# Altium PCB lab1_larionov_usb_rs232.PcbDoc
Units mm, origin at the board's own origin, x right, y up, seen from the top; angles counter-clockwise.
Board outline 53 x 36.1 mm, 4 copper layers (Top Layer, Signal Layer 1, Signal Layer 2, Bottom Layer), stack 1.522 mm thick; 33 components, 35 nets, 131 pads, 239 vias.
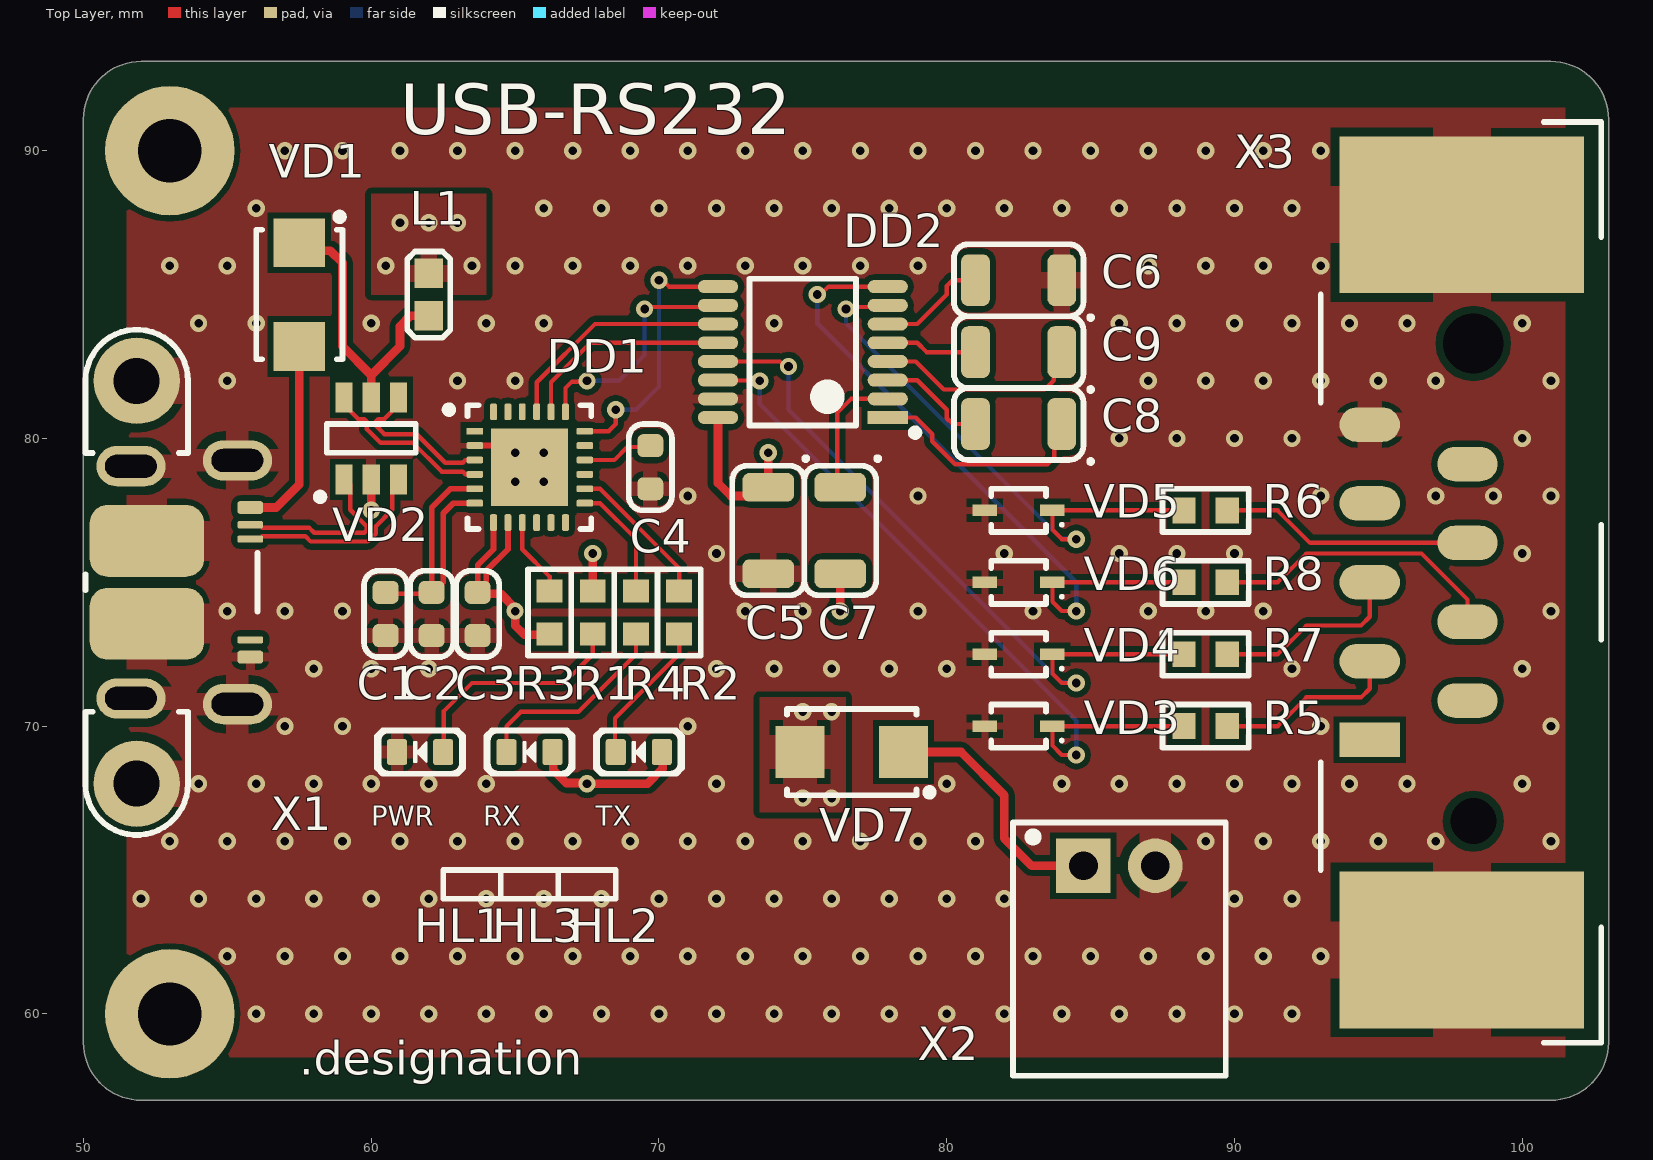
[diagram p0: Top Layer view]
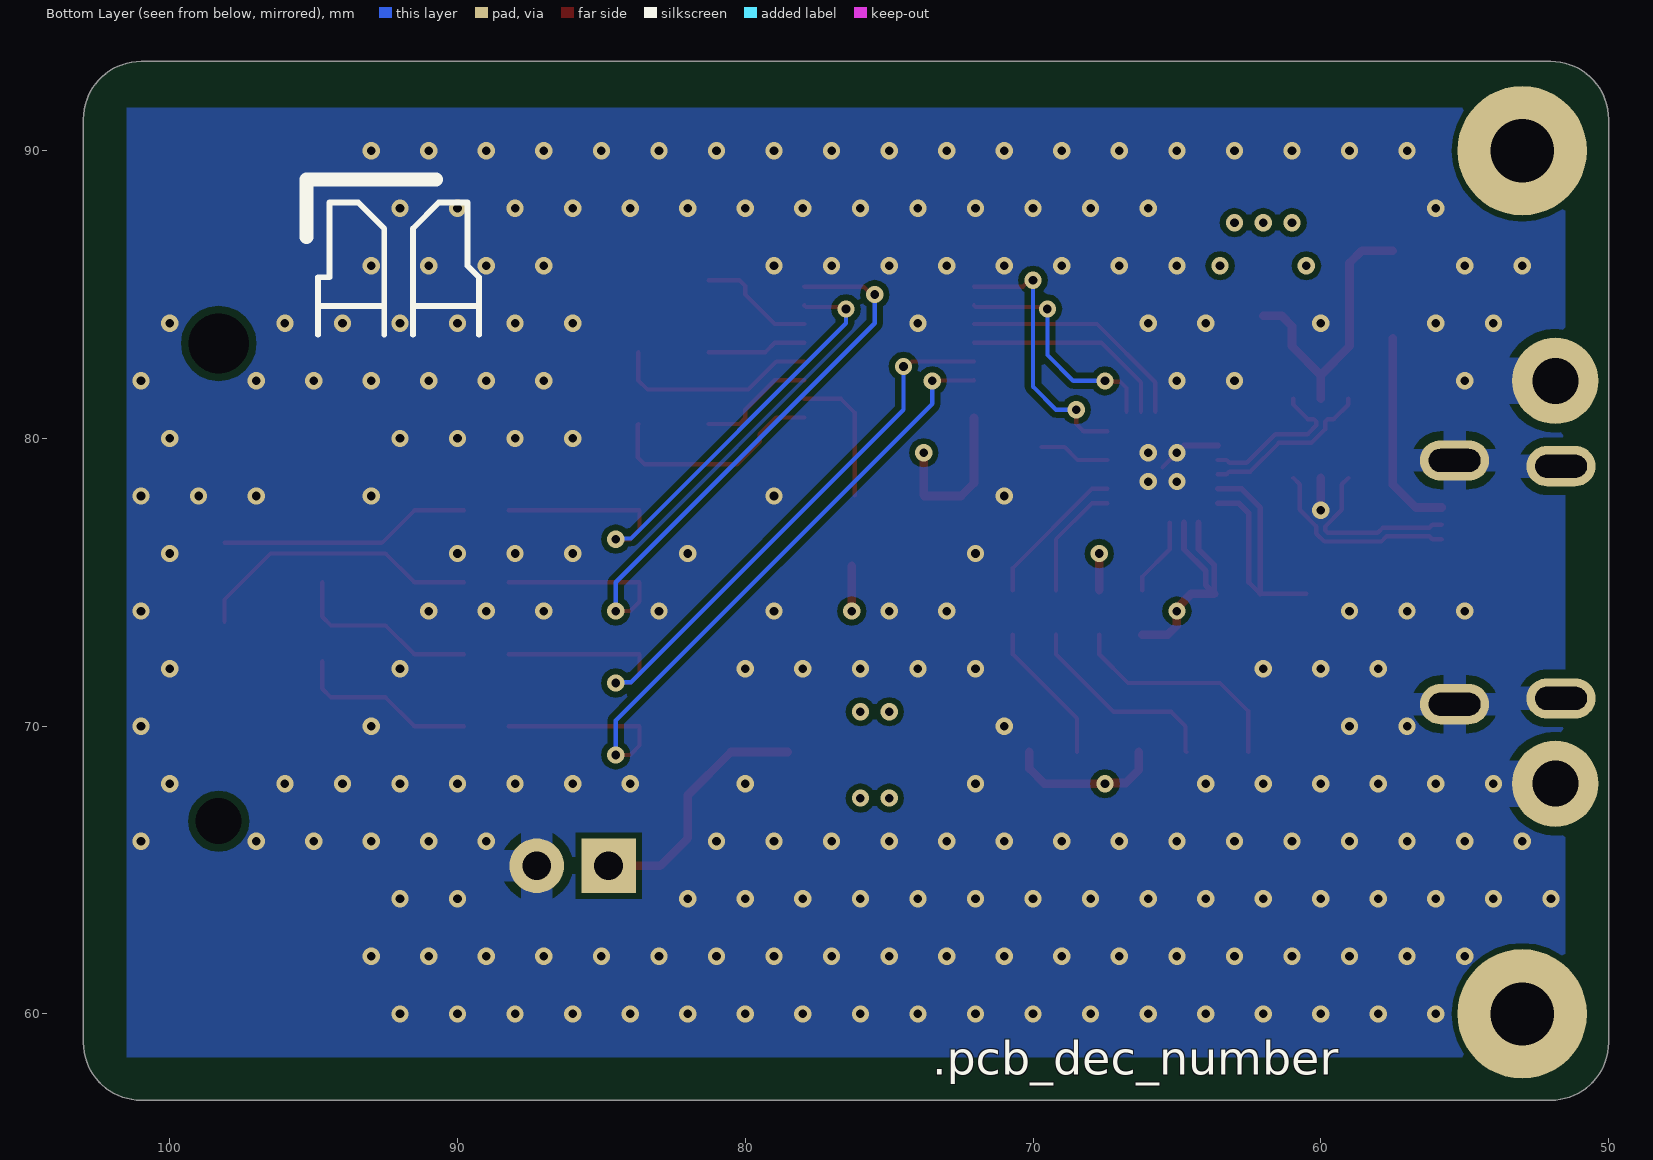
[diagram p1: Bottom Layer view, seen from below]
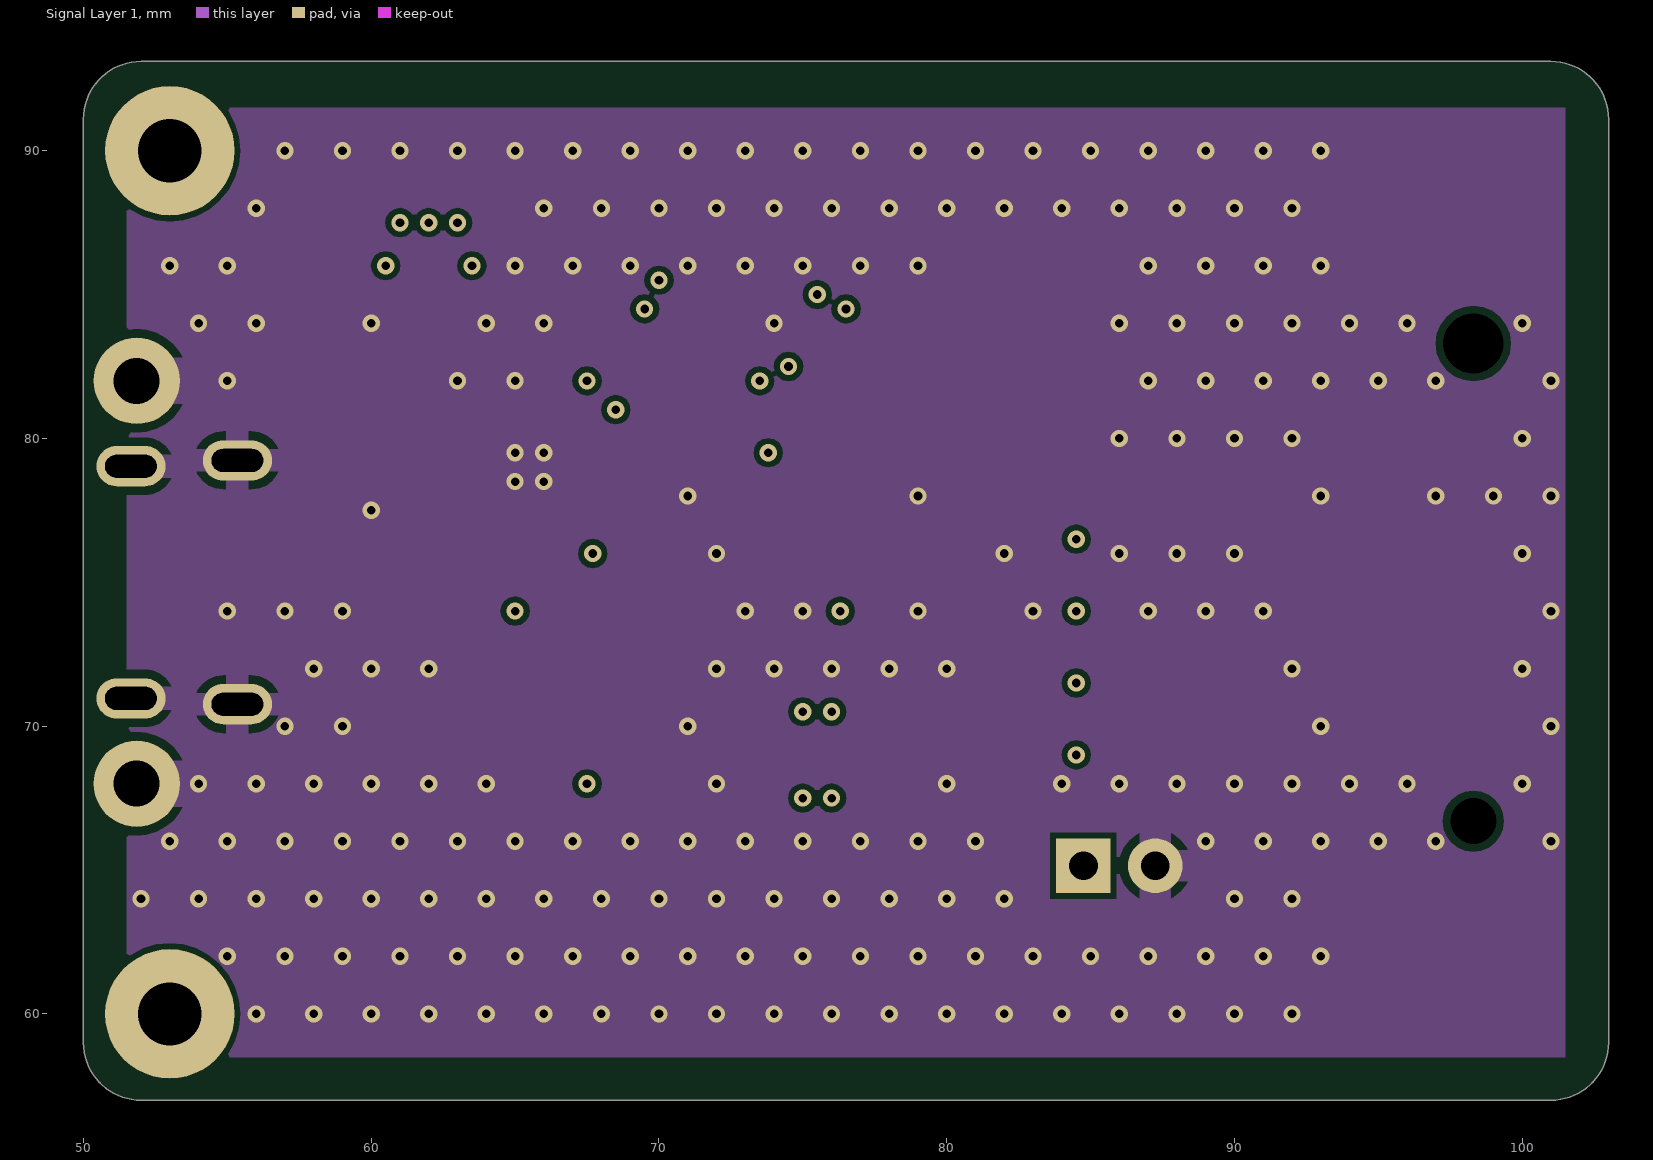
[diagram p2: Signal Layer 1]
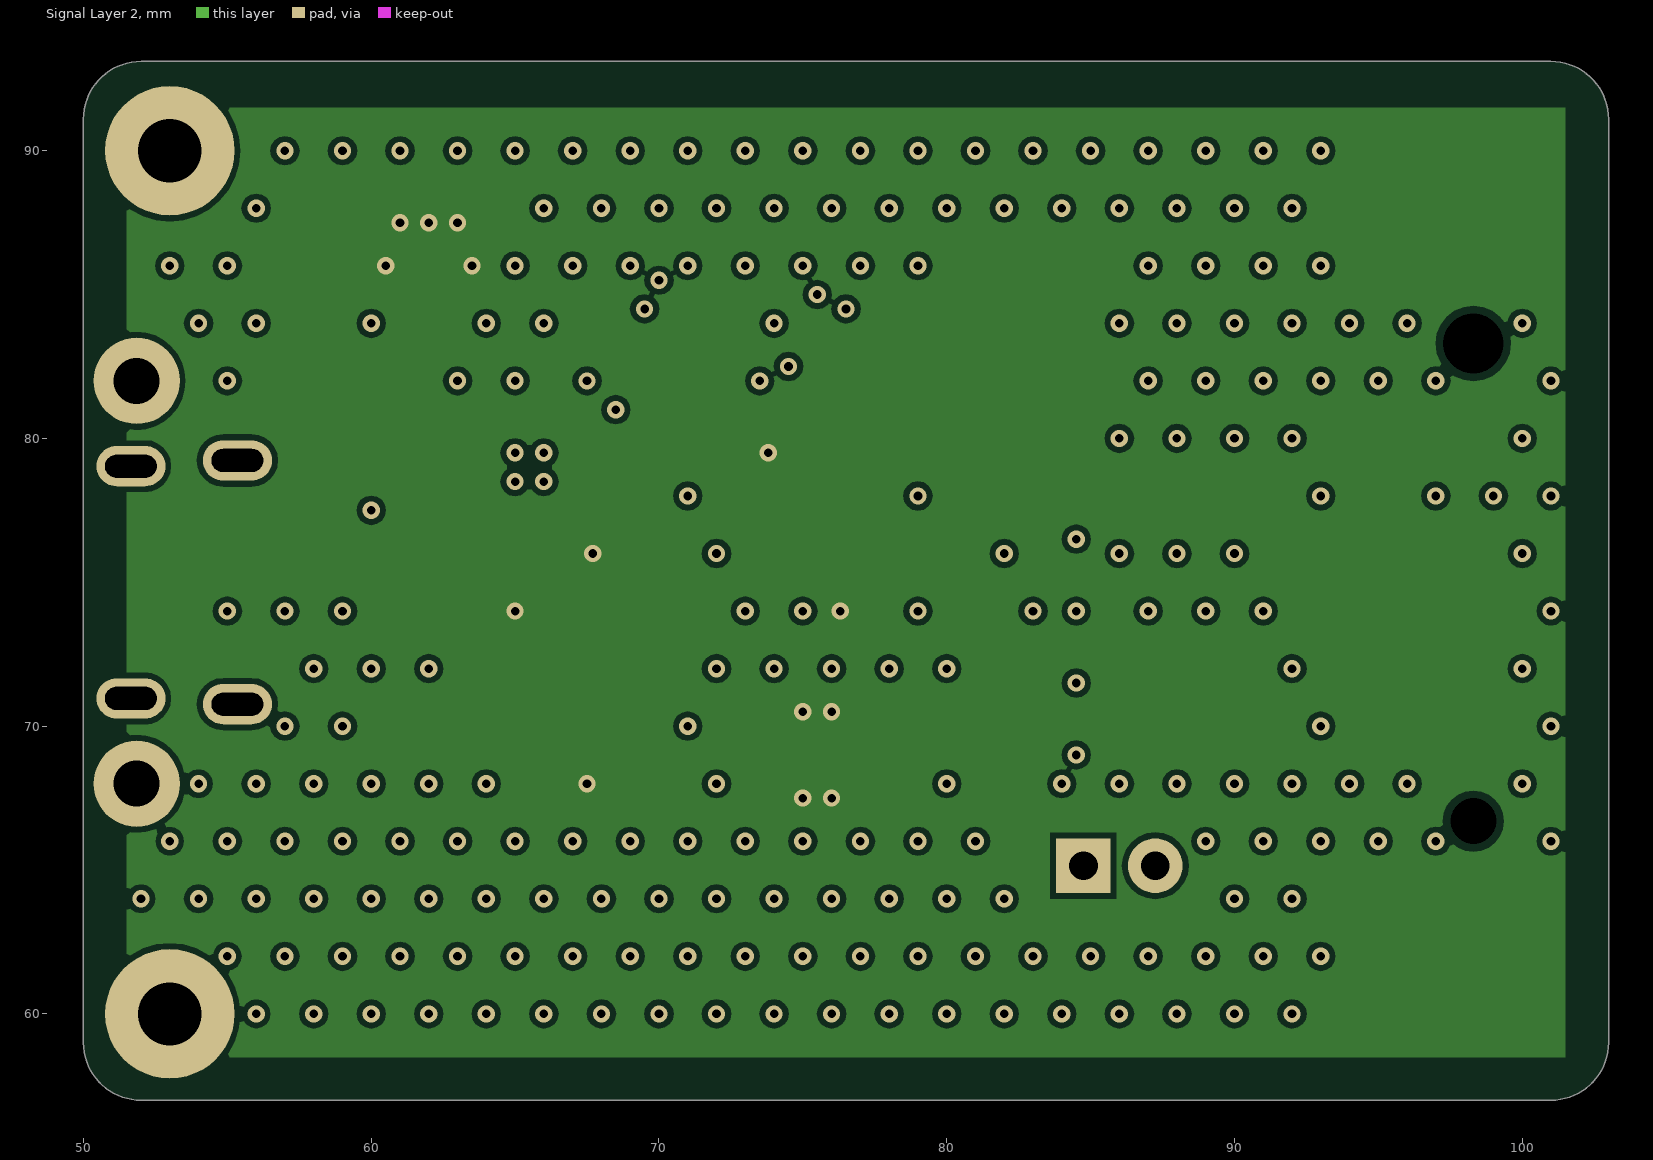
[diagram p3: Signal Layer 2]
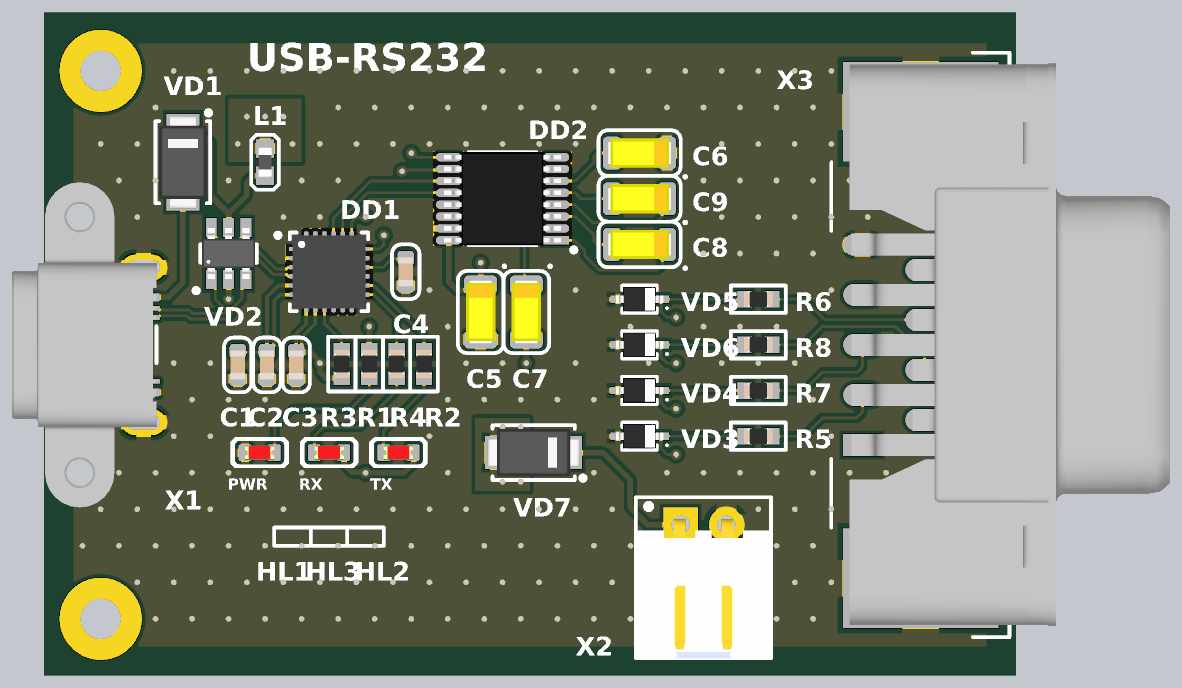
[diagram p4: 3D render of the assembled board from above, using the file's embedded part models]

## Layer stack, top to bottom
Top Solder: solder mask 0.0102, Solder Resist, Dk 3.5
Top Layer: signal copper 0.018
Prepreg 1: prepreg 0.125, FR4 HiTg170, Dk 5.07
Signal Layer 1: signal copper 0.018
Core 1: core 1.2, FR4, Dk 4.6
Signal Layer 2: signal copper 0.018
Prepreg 2: prepreg 0.125, FR4 HiTg170, Dk 5.07
Bottom Layer: signal copper 0.018
Bottom Solder: solder mask 0.0102, Solder Resist, Dk 3.5

## Board outline
52,57 cw(c52,59) 50,59 50,91.1 cw(c52,91.1) 52,93.1 101,93.1 cw(c101,91.1) 103,91.1 103,59 cw(c101,59) 101,57

## Design rules (kind name [scope] priority, off if disabled: settings)
AcuteAngle min_acute_angle [OnCopper] p1: minimum=3.50000000000000E+0001 checktracksonly=FALSE // Минимальный угол между примитивами топологии
BoardOutlineClearance board_outline_clearance_std [NOT (OnLayer('Bottom Overlay') OR OnLayer('Top Overlay'))] p1: gap=0.25 ignorepadtopadclearanceinfootprint=FALSE except(0: Arc-SplitContinuation Track-SplitContinuation SMDPad-SplitContinuation THPad-SplitContinuation Via-SplitContinuation Fill-SplitContinuation Poly-SplitContinuation Region-SplitContinuation Text-SplitContinuation) // Отступ элементов топологии от края фрезеруемой печатной платы
Clearance clearance_outer_18um_std [OnTopLayer OR OnBottomLayer] p1: gap=0.125 ignorepadtopadclearanceinfootprint=TRUE except(0.2: Arc-Fill Arc-Poly Track-Fill Track-Poly SMDPad-SMDPad SMDPad-Fill SMDPad-Poly THPad-Fill THPad-Poly Via-Fill Via-Poly Fill-Fill Fill-Poly Poly-Poly Poly-Region Poly-Text; 0.25: Arc-Hole Track-Hole SMDPad-Hole THPad-Hole Via-Hole Fill-Hole Poly-Hole Region-Hole Text-Hole) // Зазоры на внешних слоях
Clearance clearance_inner_18um_std [NOT (OnTopLayer Or OnBottomLayer)] p2: gap=0.125 ignorepadtopadclearanceinfootprint=FALSE except(0.2: Arc-Fill Arc-Poly Track-Fill Track-Poly SMDPad-SMDPad SMDPad-Fill SMDPad-Poly THPad-Fill THPad-Poly Via-Fill Via-Poly Fill-Fill Fill-Poly Poly-Poly Poly-Region Poly-Text; 0.25: Arc-Hole Track-Hole SMDPad-Hole THPad-Hole Via-Hole Fill-Hole Poly-Hole Region-Hole Text-Hole) // Зазоры на внутренних слоях
ComponentClearance [All] p1: gap=0 collisioncheckmode=3 verticalgap=0 showdistances=FALSE
DiffPairsRouting "Schematic Differential Pairs Routing_3" [InNet('USB_D_N')] p1: maxlimit=0.254 minlimit=0.15 mostfreqgap=0.254 toplayer_maxgap=0.15 toplayer_prefgap=0.15 toplayer_minwidth=0.155 toplayer_maxwidth=0.155 toplayer_prefwidth=0.155 bottomlayer_maxgap=0.15 bottomlayer_prefgap=0.15 bottomlayer_minwidth=0.155 bottomlayer_maxwidth=0.155 bottomlayer_prefwidth=0.155 impedanceprofiledriven=TRUE impedanceprofileid={1B1F1868-2FFB-4D51-908A-913D90CA9AFC} impedanceprofilevalue=95.000000 maxuncoupledlength=12.7
DiffPairsRouting "Schematic Differential Pairs Routing_2" [InNet('CN_D_P')] p2: maxlimit=0.254 minlimit=0.15 mostfreqgap=0.254 toplayer_maxgap=0.15 toplayer_prefgap=0.15 toplayer_minwidth=0.155 toplayer_maxwidth=0.155 toplayer_prefwidth=0.155 bottomlayer_maxgap=0.15 bottomlayer_prefgap=0.15 bottomlayer_minwidth=0.155 bottomlayer_maxwidth=0.155 bottomlayer_prefwidth=0.155 impedanceprofiledriven=TRUE impedanceprofileid={1B1F1868-2FFB-4D51-908A-913D90CA9AFC} impedanceprofilevalue=95.000000 maxuncoupledlength=12.7
DiffPairsRouting "Schematic Differential Pairs Routing_1" [InNet('CN_D_N')] p3: maxlimit=0.254 minlimit=0.15 mostfreqgap=0.254 toplayer_maxgap=0.15 toplayer_prefgap=0.15 toplayer_minwidth=0.155 toplayer_maxwidth=0.155 toplayer_prefwidth=0.155 bottomlayer_maxgap=0.15 bottomlayer_prefgap=0.15 bottomlayer_minwidth=0.155 bottomlayer_maxwidth=0.155 bottomlayer_prefwidth=0.155 impedanceprofiledriven=TRUE impedanceprofileid={1B1F1868-2FFB-4D51-908A-913D90CA9AFC} impedanceprofilevalue=95.000000 maxuncoupledlength=12.7
DiffPairsRouting "Schematic Differential Pairs Routing" [InNet('USB_D_P')] p4: maxlimit=0.254 minlimit=0.15 mostfreqgap=0.254 toplayer_maxgap=0.15 toplayer_prefgap=0.15 toplayer_minwidth=0.155 toplayer_maxwidth=0.155 toplayer_prefwidth=0.155 bottomlayer_maxgap=0.15 bottomlayer_prefgap=0.15 bottomlayer_minwidth=0.155 bottomlayer_maxwidth=0.155 bottomlayer_prefwidth=0.155 impedanceprofiledriven=TRUE impedanceprofileid={1B1F1868-2FFB-4D51-908A-913D90CA9AFC} impedanceprofilevalue=95.000000 maxuncoupledlength=12.7
DiffPairsRouting diff_pairs_routing [All] p5 off: maxlimit=0.254 minlimit=0.127 mostfreqgap=0.254 toplayer_maxgap=0.127 toplayer_prefgap=0.127 toplayer_minwidth=0.143 toplayer_maxwidth=0.143 toplayer_prefwidth=0.143 midlayer1_minwidth=0.381 midlayer1_maxwidth=0.381 midlayer1_prefwidth=0.381 midlayer2_minwidth=0.381 midlayer2_maxwidth=0.381 midlayer2_prefwidth=0.381 bottomlayer_maxgap=0.127 bottomlayer_prefgap=0.127 bottomlayer_minwidth=0.143 bottomlayer_maxwidth=0.143 bottomlayer_prefwidth=0.143 maxuncoupledlength=12.7 // Правила трассировки дифференциальных пар
HoleSize min_hole_size_std [IsPad] p1: absolutevalues=TRUE maxlimit=5.9 minlimit=0.6 maxpercent=80.000 minpercent=20.000 // Диаметр межслойного переходного отверстия
HoleSize min_hole_size_via_std [IsVia] p2: absolutevalues=TRUE maxlimit=5.9 minlimit=0.3 maxpercent=80.000 minpercent=20.000 // Минимальный диаметр монтажного отверстия
HoleToHoleClearance hole_to_hole_clearance_std [All] p1: gap=0.2 allowstackedmicrovias=FALSE // Минимальное расстояние между краями двух отверстий
MinimumAnnularRing min_via_ar_std [All] p1: minimumring=0.15 // Поясок площадки переходного отверстия (Annular ring VIA)
MinimumAnnularRing min_pad_ar_std [All] p2: minimumring=0.2 // Поясок монтажной контактной площадки (Annular ring PAD)
MinimumSolderMaskSliver min_solder_mask_bridge_std [All] p1: minsoldermaskwidth=0.15 // Мнимальная ширина масочного мостика
PlaneClearance plane_clearance_18um_std [All] p1: clearance=0.2 // Отступ полигона (для слоя plane) от элементов топологии
PlaneConnect [All] p1: planeconnectstyle=Relief reliefexpansion=0.5 reliefentries=4 reliefconductorwidth=0.2 reliefairgap=0.2
PolygonConnect poly_connect_to_pad<=0.3 [(AsMM(PadXSize_AllLayers)<=0.301) or (AsMM(PadYSize_AllLayers)<=0.301)] p1: thpad.connectstyle=Relief thpad.reliefconductorwidth=0.2 thpad.reliefentries=4 thpad.polygonreliefangle="90 Angle" thpad.airgapwidth=0.2 smdpad.connectstyle=Relief smdpad.reliefconductorwidth=0.2 smdpad.reliefentries=4 smdpad.polygonreliefangle="90 Angle" smdpad.airgapwidth=0.2 via.connectstyle=Direct via.reliefconductorwidth=0.254 via.reliefentries=4 via.polygonreliefangle="90 Angle" via.airgapwidth=0.254 // Правила подключения полигонов для падов от 0,3мм и меньше
PolygonConnect poly_connect_to_pad<=0.4 [(AsMM(PadXSize_AllLayers)<=0.401) or (AsMM(PadYSize_AllLayers)<=0.401)] p2: thpad.connectstyle=Relief thpad.reliefconductorwidth=0.26 thpad.reliefentries=4 thpad.polygonreliefangle="90 Angle" thpad.airgapwidth=0.2 smdpad.connectstyle=Relief smdpad.reliefconductorwidth=0.26 smdpad.reliefentries=4 smdpad.polygonreliefangle="90 Angle" smdpad.airgapwidth=0.2 via.connectstyle=Direct via.reliefconductorwidth=0.254 via.reliefentries=4 via.polygonreliefangle="90 Angle" via.airgapwidth=0.254 // Правила подключения полигонов для падов от 0,4 и меньше
PolygonConnect poly_connect_to_pad<=0.6 [(AsMM(PadXSize_AllLayers)<=0.601) or (AsMM(PadYSize_AllLayers)<=0.601)] p3: thpad.connectstyle=Relief thpad.reliefconductorwidth=0.33 thpad.reliefentries=4 thpad.polygonreliefangle="90 Angle" thpad.airgapwidth=0.2 smdpad.connectstyle=Relief smdpad.reliefconductorwidth=0.33 smdpad.reliefentries=4 smdpad.polygonreliefangle="90 Angle" smdpad.airgapwidth=0.2 via.connectstyle=Direct via.reliefconductorwidth=0.254 via.reliefentries=4 via.polygonreliefangle="90 Angle" via.airgapwidth=0.254 // Правила подключения полигонов для падов от 0,6мм и меньше
PolygonConnect poly_connect_to_pad<=0.7 [(AsMM(PadXSize_AllLayers)<=0.701) or (AsMM(PadYSize_AllLayers)<=0.701)] p4: thpad.connectstyle=Relief thpad.reliefconductorwidth=0.46 thpad.reliefentries=4 thpad.polygonreliefangle="90 Angle" thpad.airgapwidth=0.2 smdpad.connectstyle=Relief smdpad.reliefconductorwidth=0.46 smdpad.reliefentries=4 smdpad.polygonreliefangle="90 Angle" smdpad.airgapwidth=0.2 via.connectstyle=Direct via.reliefconductorwidth=0.254 via.reliefentries=4 via.polygonreliefangle="90 Angle" via.airgapwidth=0.254 // Правила подключения полигонов для падов от 0,7мм и меньше
PolygonConnect poly_connect_to_pad<=0.8 [(AsMM(PadXSize_AllLayers)<=0.8)or(AsMM(PadYSize_AllLayers)<=0.8)] p5: thpad.connectstyle=Relief thpad.reliefconductorwidth=0.53 thpad.reliefentries=4 thpad.polygonreliefangle="90 Angle" thpad.airgapwidth=0.3 smdpad.connectstyle=Relief smdpad.reliefconductorwidth=0.53 smdpad.reliefentries=4 smdpad.polygonreliefangle="90 Angle" smdpad.airgapwidth=0.2 via.connectstyle=Direct via.reliefconductorwidth=0.254 via.reliefentries=4 via.polygonreliefangle="90 Angle" via.airgapwidth=0.254 // Правила подключения полигонов для падов от 0,8мм и меньше
PolygonConnect poly_connect_to_pad<=1 [(AsMM(PadXSize_AllLayers)<=1.01)or(AsMM(PadYSize_AllLayers)<=1.01)] p6: thpad.connectstyle=Relief thpad.reliefconductorwidth=0.6 thpad.reliefentries=4 thpad.polygonreliefangle="90 Angle" thpad.airgapwidth=0.3 smdpad.connectstyle=Relief smdpad.reliefconductorwidth=0.6 smdpad.reliefentries=4 smdpad.polygonreliefangle="90 Angle" smdpad.airgapwidth=0.2 via.connectstyle=Direct via.reliefconductorwidth=0.254 via.reliefentries=4 via.polygonreliefangle="90 Angle" via.airgapwidth=0.254 // Правила подключения полигонов для падов от 1мм и меньше
PolygonConnect poly_connect_to_pad<=1.3 [(AsMM(PadXSize_AllLayers)<=1.31)or(AsMM(PadYSize_AllLayers)<=1.31)] p7: thpad.connectstyle=Relief thpad.reliefconductorwidth=0.66 thpad.reliefentries=4 thpad.polygonreliefangle="90 Angle" thpad.airgapwidth=0.3 smdpad.connectstyle=Relief smdpad.reliefconductorwidth=0.86 smdpad.reliefentries=4 smdpad.polygonreliefangle="90 Angle" smdpad.airgapwidth=0.2 via.connectstyle=Direct via.reliefconductorwidth=0.254 via.reliefentries=4 via.polygonreliefangle="90 Angle" via.airgapwidth=0.254 // Правила подключения полигонов для падов от 1,3мм и меньше
PolygonConnect poly_connect_to_pad<=1.6 [(AsMM(PadXSize_AllLayers)<=1.61)or(AsMM(PadYSize_AllLayers)<=1.61)] p8: thpad.connectstyle=Relief thpad.reliefconductorwidth=0.8 thpad.reliefentries=4 thpad.polygonreliefangle="90 Angle" thpad.airgapwidth=0.3 smdpad.connectstyle=Relief smdpad.reliefconductorwidth=1 smdpad.reliefentries=4 smdpad.polygonreliefangle="90 Angle" smdpad.airgapwidth=0.2 via.connectstyle=Direct via.reliefconductorwidth=0.254 via.reliefentries=4 via.polygonreliefangle="90 Angle" via.airgapwidth=0.254 // Правила подключения полигонов для падов от 1,6мм и меньше
PolygonConnect poly_connect_to_pad<=1.8 [(AsMM(PadXSize_AllLayers)<=1.8)or(AsMM(PadYSize_AllLayers)<=1.8)] p9: thpad.connectstyle=Relief thpad.reliefconductorwidth=1 thpad.reliefentries=4 thpad.polygonreliefangle="90 Angle" thpad.airgapwidth=0.3 smdpad.connectstyle=Relief smdpad.reliefconductorwidth=1.2 smdpad.reliefentries=4 smdpad.polygonreliefangle="90 Angle" smdpad.airgapwidth=0.2 via.connectstyle=Direct via.reliefconductorwidth=0.254 via.reliefentries=4 via.polygonreliefangle="90 Angle" via.airgapwidth=0.254 // Правила подключения полигонов для падов от 1,8мм и меньше
PolygonConnect poly_connect_to_pad<=2 [(AsMM(PadXSize_AllLayers)<=2.01)or(AsMM(PadYSize_AllLayers)<=2.01)] p10: thpad.connectstyle=Relief thpad.reliefconductorwidth=1.1 thpad.reliefentries=4 thpad.polygonreliefangle="90 Angle" thpad.airgapwidth=0.3 smdpad.connectstyle=Relief smdpad.reliefconductorwidth=1.4 smdpad.reliefentries=4 smdpad.polygonreliefangle="90 Angle" smdpad.airgapwidth=0.2 via.connectstyle=Direct via.reliefconductorwidth=0.254 via.reliefentries=4 via.polygonreliefangle="90 Angle" via.airgapwidth=0.254 // Правила подключения полигонов для падов от 2мм и меньше
PolygonConnect poly_connect_to_pad<=2.3 [(AsMM(PadXSize_AllLayers)<=2.31)or(AsMM(PadYSize_AllLayers)<=2.31)] p11: thpad.connectstyle=Relief thpad.reliefconductorwidth=1.2 thpad.reliefentries=4 thpad.polygonreliefangle="90 Angle" thpad.airgapwidth=0.3 smdpad.connectstyle=Relief smdpad.reliefconductorwidth=1.4 smdpad.reliefentries=4 smdpad.polygonreliefangle="90 Angle" smdpad.airgapwidth=0.2 via.connectstyle=Direct via.reliefconductorwidth=0.254 via.reliefentries=4 via.polygonreliefangle="90 Angle" via.airgapwidth=0.254 // Правила подключения полигонов для падов от 2,3мм и меньше
PolygonConnect poly_connect_to_pad<=2.5 [(AsMM(PadXSize_AllLayers)<=2.51)or(AsMM(PadYSize_AllLayers)<=2.51)] p12: thpad.connectstyle=Relief thpad.reliefconductorwidth=1.2 thpad.reliefentries=4 thpad.polygonreliefangle="90 Angle" thpad.airgapwidth=0.3 smdpad.connectstyle=Relief smdpad.reliefconductorwidth=1.4 smdpad.reliefentries=4 smdpad.polygonreliefangle="90 Angle" smdpad.airgapwidth=0.2 via.connectstyle=Direct via.reliefconductorwidth=0.254 via.reliefentries=4 via.polygonreliefangle="90 Angle" via.airgapwidth=0.254 // Правила подключения полигонов для падов от 2,5мм и меньше
PolygonConnect poly_connect_to_pad<=2.7 [(AsMM(PadXSize_AllLayers)<=2.71)or(AsMM(PadYSize_AllLayers)<=2.71)] p13: thpad.connectstyle=Relief thpad.reliefconductorwidth=1.4 thpad.reliefentries=4 thpad.polygonreliefangle="90 Angle" thpad.airgapwidth=0.3 smdpad.connectstyle=Relief smdpad.reliefconductorwidth=1.6 smdpad.reliefentries=4 smdpad.polygonreliefangle="90 Angle" smdpad.airgapwidth=0.2 via.connectstyle=Direct via.reliefconductorwidth=0.254 via.reliefentries=4 via.polygonreliefangle="90 Angle" via.airgapwidth=0.254 // Правила подключения полигонов для падов от 2,7мм и меньше
PolygonConnect poly_connect_to_pad<=3 [(AsMM(PadXSize_AllLayers)<=3.01)or(AsMM(PadYSize_AllLayers)<=3.01)] p14: thpad.connectstyle=Relief thpad.reliefconductorwidth=1.6 thpad.reliefentries=4 thpad.polygonreliefangle="90 Angle" thpad.airgapwidth=0.3 smdpad.connectstyle=Relief smdpad.reliefconductorwidth=1.8 smdpad.reliefentries=4 smdpad.polygonreliefangle="90 Angle" smdpad.airgapwidth=0.2 via.connectstyle=Direct via.reliefconductorwidth=0.254 via.reliefentries=4 via.polygonreliefangle="90 Angle" via.airgapwidth=0.254 // Правила подключения полигонов для падов от 3мм и меньше
PolygonConnect poly_connect_to_pad<=7 [(AsMM(PadXSize_AllLayers)<7.01)or(AsMM(PadYSize_AllLayers)<=7.01)] p15: thpad.connectstyle=Relief thpad.reliefconductorwidth=2 thpad.reliefentries=4 thpad.polygonreliefangle="90 Angle" thpad.airgapwidth=0.4 smdpad.connectstyle=Relief smdpad.reliefconductorwidth=2 smdpad.reliefentries=4 smdpad.polygonreliefangle="90 Angle" smdpad.airgapwidth=0.3 via.connectstyle=Direct via.reliefconductorwidth=0.254 via.reliefentries=4 via.polygonreliefangle="90 Angle" via.airgapwidth=0.254 // Правила подключения полигонов для падов от 7мм и меньше
PolygonConnect poly_connect_to_pad [All] p16: thpad.connectstyle=Relief thpad.reliefconductorwidth=0.25 thpad.reliefentries=4 thpad.polygonreliefangle="90 Angle" thpad.airgapwidth=0.2 smdpad.connectstyle=Relief smdpad.reliefconductorwidth=0.25 smdpad.reliefentries=4 smdpad.polygonreliefangle="90 Angle" smdpad.airgapwidth=0.2 via.connectstyle=Direct via.reliefconductorwidth=0.25 via.reliefentries=4 via.polygonreliefangle="90 Angle" via.airgapwidth=0.2 // Правила подключения полигонов общие
RoutingCorners [All] p1 off: cornerstyle=45-Degree minsetback=2.5 maxsetback=2.5
RoutingVias [All] p1: holewidth=0.3 width=0.6 viastyle="Through Hole" minholewidth=0.3 minwidth=0.6 maxholewidth=5.9 maxwidth=6.4
SilkToSilkClearance silk_to_silk_clearance_std [All] p1 off: silktosilkclearance=0.15 // Отступ текста шелкографии от других примитивов шелкографии
SilkToSolderMaskClearance silk_to_solder_mask_clearance_std [IsPad] p1 off: minsilkscreentomaskgap=0.15 clearancetoexposedcopper=FALSE // Минимальное расстояние между элементами шелкографии и вскрытой медью
SolderMaskExpansion solder_mask_expansion_std [All] p1: expansion=0.05 // Припуск паяльной масски
UnRoutedNet [All] p1: checkbadconnections=TRUE
Width width_18um_std [All] p1: maxlimit=10 minlimit=0.125 preferedwidth=0.15 checkconnectedcopper=TRUE // Ширина проводников (общая)
19 further rules are at their usual default settings.

## Classes and differential pairs
differential pair class USB_SIGNALS: CN_D USB_D
differential pair USB_D: +USB_D_P -USB_D_N
differential pair CN_D: +CN_D_P -CN_D_N

## Components (designator, comment, footprint, x,y, rotation, side; value= is the part's Value field where it differs from the comment)
C1 "1 мк" C0603 60.5,73.9 r90 top
C2 "0,1 мк" C0603 62.1,73.9 r90 top
C3 "1 мк" C0603 63.7,73.9 r90 top
C4 "4,7 мк" C0603 69.7,79 r90 top
C5 "0,1 мк" C1206POLAR 73.8,76.8 r270 top
C6 "0,1 мк" C1206POLAR 82.5,85.5 r180 top
C7 "0,1 мк" C1206POLAR 76.3,76.8 r270 top
C8 "0,1 мк" C1206POLAR 82.5,80.5 r180 top
C9 "0,1 мк" C1206POLAR 82.5,83 r180 top
DD1 "CP2104-F03-GM" QFN-24-400X400X80 65.5,79 r0 top
DD2 "ST202BTR" TSSOP-16 75,83 r180 top
HL1 "TLMY1000-GS08" HL0603 61.7,69.1 r0 top
HL2 "TLMS1000-GS08" HL0603 69.3,69.1 r0 top
HL3 "TLMG1100-GS08" HL0603 65.5,69.1 r0 top
L1 "BLM18KG221SH1D" BLM-2-0603 62,85 r90 top
R1 "330" R0603 67.7,73.95 r90 top
R2 "330" R0603 70.7,73.95 r270 top
R3 "4,7 к" R0603 66.2,73.95 r270 top
R4 "330" R0603 69.2,73.95 r270 top
R5 "22" R0603 89,70 r0 top
R6 "22" R0603 89,77.5 r0 top
R7 "22" R0603 89,72.5 r0 top
R8 "22" R0603 89,75 r0 top
VD1 "SL13-E3/5AT" DO-214AC 57.5,85 r270 top
VD2 "USBLC6-2SC6" SOT-23-6 60,80 r90 top
VD3 "SD12C-01FTG" SOD-323 82.5,70 r180 top
VD4 "SD12C-01FTG" SOD-323 82.5,72.5 r180 top
VD5 "SD12C-01FTG" SOD-323 82.5,77.5 r180 top
VD6 "SD12C-01FTG" SOD-323 82.5,75 r180 top
VD7 "SL13-E3/5AT" DO-214AC 76.7,69.1 r180 top
X1 "2108877-1" 2108877-1 52.1,75 r90 top
X2 "DS1029-2-MRW6XB" DS1029-2-MRW6XB 86,62 r0 top
X3 "1-1740194-2" 1-1740194-2 102.5,75 r270 top

## Footprints (in the part's own frame and the unit in brackets; to place one, negate y for a bottom-side part, rotate by r counter-clockwise, add the part's x,y. Pads: shape width x height; smd on the part's side, far side on the other; paste and mask are expansions set on the pad)
1-1740194-2 [mm]
  rect 1.2x2.1 smd: 1(5.48,-7.8)
  oval 1.2x2.1 smd: 2(2.74,-7.8) 3(0,-7.8) 4(-2.74,-7.8) 5(-5.48,-7.8) 6(4.11,-4.4) 7(1.37,-4.4) 8(-1.37,-4.4) 9(-4.11,-4.4)
  rect 5.45x8.5 smd: TP1(-12.775,-4.6) TP1(12.775,-4.6)
  round 0 hole 2.1: ""(-8.3,-4.2)
  round 0 hole 1.6: ""(8.3,-4.2)
  silkscreen extent -16,-9.5 16,0.25, body extent -15.4,-8.5 15.4,9, height 9.87
2108877-1 [mm]
  rrect50% 0.45x0.9 smd: 1(2.6,-3.696) 5(-2.6,-3.696)
  rrect50% 0.25x0.9 smd: 2(2,-3.696) 3(1.5,-3.696) 4(-2,-3.696)
  round 3 hole 1.6: TP1(-7,0.25) TP1(7,0.25)
  oval 1.4x2.4 hole 0.8 slot 1.8 at 90 deg mask+0.102: TP1(-4.235,-3.25) TP1(-4.035,0.45) TP1(4.035,0.45) TP1(4.235,-3.25)
  rrect50% 2.5x3.98 smd: TP1(-1.441,-0.104) TP1(1.441,-0.104)
  silkscreen extent -8.78,-3.95 8.78,2.03, body extent -8.9,-3.95 8.9,3.95, height 3.39
BLM-2-0603 [mm] "Chip Inductor, 2-Leads, Body 1,60x0,80mm, IPC Medium Density"
  rect 1.02x0.98 smd: 1(-0.74,0) 2(0.74,0)
  silkscreen extent -1.5,-0.75 1.5,0.75, body extent -0.8,-0.37 0.8,0.38, height 0.8
C0603 [mm] "Chip Capacitor, 2-Leads, Body 1,60x0,80mm, IPC Medium Density"
  rrect50% 0.8x0.9 smd: 1(-0.75,0) 2(0.75,0)
  silkscreen extent -1.5,-0.75 1.5,0.75, body extent -0.8,-0.4 0.8,0.4, height 0.8
C1206POLAR [mm] "Chip Capacitor, 2-Leads, Body 3,20x1,60mm, IPC Medium Density"
  rrect50% 1x1.8 smd: 1(-1.5,0) 2(1.5,0)
  silkscreen extent -2.55,-1.25 2.25,1.35, body extent -1.73,-0.8 1.73,0.8, height 1.65
DO-214AC [mm] "Molded Diode, 2-Leads, Body 4,25x2,67mm, IPC Medium Density"
  rect 1.7x1.8 smd: 1(-1.8,0) 2(1.8,0)
  silkscreen extent -2.82,-1.5 2.25,1.53, body extent -2.55,-1.3 2.55,1.3, height 2.26
DS1029-2-MRW6XB [mm]
  rect 1.9x1.9 hole 1: 1(-1.25,3.15)
  round 1.9 hole 1: 2(1.25,3.15)
  silkscreen extent -3.7,-4.15 3.7,4.65, body extent -3.7,-4.17 3.7,3.47, height 5.75
HL0603 [mm] "Chip Resistor, 2-Leads, Body 1,60x0,80mm, IPC Medium Density"
  rrect25% 0.7x0.9 smd: 1(-0.8,0) 2(0.8,0)
  silkscreen extent -1.5,-0.75 1.5,0.75, body extent -0.81,-0.4 0.81,0.4, height 0.64
QFN-24-400X400X80 [mm] "QFN, 24-Leads, Body 4,00x4,00mm, Pitch 0,50mm, Thermal Pad 2,68x2,68mm, IPC Medium Density"
  rect 2.68x2.68 smd: 0(0,0)
  rect 0.58x0.24 smd: 1(-1.9,1.25)
  rrect50% 0.58x0.24 smd: 2(-1.9,0.75) 3(-1.9,0.25) 4(-1.9,-0.25) 5(-1.9,-0.75) 6(-1.9,-1.25) 13(1.925,-1.25) 14(1.925,-0.75) 15(1.925,-0.25) 16(1.925,0.25) 17(1.925,0.75) 18(1.925,1.25)
  rrect50% 0.24x0.58 smd: 7(-1.25,-1.925) 8(-0.75,-1.925) 9(-0.25,-1.925) 10(0.25,-1.925) 11(0.75,-1.925) 12(1.25,-1.925) 19(1.25,1.925) 20(0.75,1.925) 21(0.25,1.925) 22(-0.25,1.925) 23(-0.75,1.925) 24(-1.25,1.925)
  silkscreen extent -2.92,-2.15 2.15,2.15, body extent -2,-2 2.01,2.01, height 0.9
R0603 [mm] "Chip Resistor, 2-Leads, Body 1,60x0,80mm, IPC Medium Density"
  rect 0.8x0.9 smd: 1(-0.75,0) 2(0.75,0)
  silkscreen extent -1.5,-0.75 1.5,0.75, body extent -0.77,-0.43 0.78,0.43, height 0.43
SOD-323 [mm] "SODFL, 2-Leads, Body 1,30x2,57mm, IPC Medium Density"
  rect 0.85x0.4 smd: 1(-1.175,0) 2(1.175,0)
  silkscreen extent -1.55,-0.75 0.95,0.75, body extent -1.3,-0.67 1.3,0.68, height 1.1
SOT-23-6 [mm] "SOT-23, 6-Leads, Body 2,90x2,70mm, Pitch 0,95mm, IPC Medium Density"
  rect 1.05x0.6 smd: 1(-1.425,0.95) 2(-1.425,0) 3(-1.425,-0.95) 4(1.425,-0.95) 5(1.425,0) 6(1.425,0.95)
  silkscreen extent -2.16,-1.55 0.5,1.9, body extent -1.41,-1.45 1.41,1.45, height 1.45
TSSOP-16 [mm] "TSOP, 16-Leads, Body 5,00x4,40mm, Pitch 0,65mm, IPC Medium Density"
  rect 1.4x0.45 smd: 1(-2.95,2.275)
  oval 1.4x0.45 smd: 2(-2.95,1.625) 3(-2.95,0.975) 4(-2.95,0.325) 5(-2.95,-0.325) 6(-2.95,-0.975) 7(-2.95,-1.625) 8(-2.95,-2.275) 9(2.95,-2.275) 10(2.95,-1.625) 11(2.95,-0.975) 12(2.95,-0.325) 13(2.95,0.325) 14(2.95,0.975) 15(2.95,1.625) 16(2.95,2.275)
  silkscreen extent -4.03,-2.55 1.85,2.92, body extent -3.2,-2.55 3.2,2.55, height 1.1

## Part data
C1 C3: library part c0090, "=Описание", HelpURL=https://www.yageo.com/upload/media/product/productsearch/datasheet/mlcc/UPY-GPHC_X7R_6.3V-to-50V_20.pdf, ID=c0090, Корпус=0603, Наименование=CC0603KRX7R8BB105, Напряжение="25 В", Номинал="1 мк", Номинальное напряжение="25 В", Описание="Конденсатор чип 0603 1 мкФ 25 В ±10 %", Отклонение="±10 %", Производитель="YAGEO Corp.", Рабочие температуры="от –55 °С до +125 °С", Температурный коэффициент емкости=X7R, Фамилия=Ларионов
C2: library part c0060, "=Описание", HelpURL=https://www.yageo.com/upload/media/product/productsearch/datasheet/mlcc/UPY-GPHC_X7R_6.3V-to-50V_20.pdf, ID=c0060, Корпус=0603, Наименование=CC0603JRX7R9BB104, Напряжение="50 В", Номинал="0,1 мк", Номинальное напряжение="50 В", Описание="Конденсатор чип 0603 100 нФ 50 В ±5 %", Отклонение="±5 %", Производитель="YAGEO Corp.", Рабочие температуры="от –55 °С до +125 °С", Температурный коэффициент емкости=X7R, Фамилия=Ларионов
C4: library part c0111, "=Описание", HelpURL=https://www.yageo.com/upload/media/product/productsearch/datasheet/mlcc/UPY-GPHC_X5R_4V-to-50V_26.pdf, ID=c0111, Корпус=0603, Наименование=CC0603KRX5R8BB475, Напряжение="25 В", Номинал="4,7 мк", Номинальное напряжение="25 В", Описание="Конденсатор чип 0603 4,7 мкФ 25 В ±10 %", Отклонение="±10 %", Производитель="YAGEO Corp.", Рабочие температуры="от –55 °С до +85 °С", Температурный коэффициент емкости=X5R, Фамилия=Ларионов
C5 C6 C7 C8 C9: library part c0149, "=Описание", HelpURL=https://www.vishay.com/capacitors/list/product-40002/, ID=c0149, Корпус=1206, Наименование=293D104X9050A2TE3, Напряжение="50 В", Номинал="0,1 мк", Номинальное напряжение="50 В", Описание="Конденсатор чип 1206 100 нФ 50 В ±10 % полярный", Отклонение="±10 %", Производитель="Vishay Intertechnology, Inc.", Рабочие температуры="от –55 °С до +125 °С", Температурный коэффициент емкости=—, Фамилия=Ларионов
DD1: library part dd0001, "=Описание", HelpURL=https://www.silabs.com/interface/usb-bridges/classic/device.cp2104, ID=dd0001, Корпус=QFN-24, Наименование=CP2104-F03-GM, Описание="Преобразователь USB-UART", Производитель="Silicon Laboratories", Фамилия=Ларионов
DD2: library part dd0006, "=Описание", HelpURL=https://www.st.com/content/st_com/en/products/interfaces-and-transceivers/rs-232/st202b.html, ID=dd0006, Корпус=TSSOP-16, Наименование=ST202BTR, Описание="Приемопередатчик RS-232", Производитель=STMicroelectronics, Фамилия=Ларионов
HL1: library part hl0003, "=Описание", Colour=Желтый, HelpURL=https://www.vishay.com/leds/list/product-83172/, ID=hl0003, Корпус=0603, Наименование=TLMY1000-GS08, Номинальная длина волны="588 нм", Номинальная сила света="7,5 мкд", Номинальное падение напряжения="1,8 В", Номинальный прямой ток="15 мА", Описание="Светодиод чип 0603 желтый", Производитель="Vishay Intertechnology, Inc.", Рабочие температуры="от –40 °С до +100 °С", Рассеиваемая мощность="40 мВт", Фамилия=Ларионов, Цвет=Желтый
HL2: library part hl0001, "=Описание", Colour=Красный, HelpURL=https://www.vishay.com/leds/list/product-83172/, ID=hl0001, Корпус=0603, Наименование=TLMS1000-GS08, Номинальная длина волны="628 нм", Номинальная сила света="4 мкд", Номинальное падение напряжения="1,8 В", Номинальный прямой ток="15 мА", Описание="Светодиод чип 0603 красный", Производитель="Vishay Intertechnology, Inc.", Рабочие температуры="от –40 °С до +100 °С", Рассеиваемая мощность="40 мВт", Фамилия=Ларионов, Цвет=Красный
HL3: library part hl0005, "=Описание", Colour=Зеленый, HelpURL=https://www.vishay.com/leds/list/product-83173/, ID=hl0005, Корпус=0603, Наименование=TLMG1100-GS08, Номинальная длина волны="570 нм", Номинальная сила света="35 мкд", Номинальное падение напряжения="2,1 В", Номинальный прямой ток="30 мА", Описание="Светодиод чип 0603 зеленый", Производитель="Vishay Intertechnology, Inc.", Рабочие температуры="от –40 °С до +100 °С", Рассеиваемая мощность="90 мВт", Фамилия=Ларионов, Цвет=Зеленый
L1: library part l0001, "=Описание", HelpURL=https://www.murata.com/en-global/products/productdetail?partno=BLM18KG221SH1%23, ID=l0001, Корпус=0603, Наименование=BLM18KG221SH1D, Описание="Ферритовая бусина 220 Ом ±25 %", Отклонение, 100 МГц="±25 %", Производитель="Murata Manufacturing Co., Ltd.", Рабочие температуры="от –55 °С до +125 °С", Сопротивление, 100 МГц="220 Ом", Сопротивление при постоянном токе="0,05 Ом", Фамилия=Ларионов
R1 R2 R4: library part r0005, "=Описание", HelpURL=https://www.yageo.com/upload/media/product/productsearch/datasheet/rchip/PYu-RC_Group_51_RoHS_L_11.pdf, ID=r0005, Корпус=0603, Наименование=RC0603FR-07330RL, Номинал=330, Номинальное напряжение="75 В", Номинальный ток="1 А", Описание="Резистор чип 0603 330 Ом ±1 % 0,1 Вт", Отклонение="±1 %", Производитель=Yageo, Рабочие температуры="от -55 °С до +155 °С", Фамилия=Ларионов
R3: library part r0006, "=Описание", HelpURL=https://www.yageo.com/upload/media/product/productsearch/datasheet/rchip/PYu-RC_Group_51_RoHS_L_11.pdf, ID=r0006, Корпус=0603, Наименование=RC0603FR-074K7L, Номинал="4,7 к", Номинальное напряжение="75 В", Номинальный ток="1 А", Описание="Резистор чип 0603 4,7 кОм ±1 % 0,1 Вт", Отклонение="±1 %", Производитель=Yageo, Рабочие температуры="от -55 °С до +155 °С", Фамилия=Ларионов
R5 R6 R7 R8: library part r0003, "=Описание", HelpURL=https://www.yageo.com/upload/media/product/productsearch/datasheet/rchip/PYu-RC_Group_51_RoHS_L_11.pdf, ID=r0003, Корпус=0603, Наименование=RC0603FR-0722R, Номинал=22, Номинальное напряжение="75 В", Номинальный ток="1 А", Описание="Резистор чип 0603 22 Ом ±1 % 0,1 Вт", Отклонение="±1 %", Производитель=Yageo, Рабочие температуры="от -55 °С до +155 °С", Фамилия=Ларионов
VD1 VD3 VD4 VD5 VD6 VD7: library part vd0003, "=Описание", ID=vd0003, Фамилия=Ларионов
  VD1 VD7: HelpURL=https://www.vishay.com/product?docid=88740, Корпус=DO-214AC, Максимальное обратное напряжение="30 В", Максимальное прямое напряжение="0,445 В", Максимальный прямой ток="1,5 А", Наименование=SL13-E3/5AT, Описание="Диод Шоттки 30 В 1,5 А", Производитель="Vishay Intertechnology, Inc.", Рабочие температуры="от –55 °С до +125 °С"
  VD3 VD4 VD5 VD6: HelpURL=https://www.littelfuse.com/products/tvs-diode-arrays/general-purpose-esd-protection/sdc/sd12c_01ftg.aspx, Корпус=SOD-323, Наименование=SD12C-01FTG, Описание="Двунаправленная диодная сборка для подавления помех, 12 В", Производитель="Littelfuse, Inc."
VD2: library part vd0009, "=Описание", HelpURL=https://www.st.com/content/st_com/en/products/protection-devices/esd-protection/usb-port-protection/usblc6-2.html, ID=vd0009, Корпус=SOT-23-6, Наименование=USBLC6-2SC6, Описание="Диодная сборка для подавления помех, от 6 В", Производитель=STMicroelectronics, Фамилия=Ларионов
X1: library part x0001, Contact_1=VBUS, Contact_2=D-, Contact_3=D+, Contact_4=ID, Contact_5=GND, HelpURL=https://www.te.com/global-en/product-2108877-1.html, ID=x0001, Наименование=2108877-1, Описание="USB 2.0 Micro USB Type B IP68 гнездо прямой угол", Производитель="TE Connectivity", Фамилия=Ларионов
X2: library part x0004, "=Описание", Contact_1=+5В, Contact_2=GND, HelpURL=http://www.connfly.com/productshow.aspx?id=352, ID=x0004, Наименование=DS1029-2-MRW6XB, Описание="CWF 2 pin Type B 2,5 мм вилка угловой", Производитель="Connfly Electronic Co. LTD", Фамилия=Ларионов
X3: library part x0002, Contact_1=CD, Contact_2=TD, Contact_3=RD, Contact_4=DTR, Contact_5=GND, Contact_6=DSR, Contact_7=CTS, Contact_8=RTS, Contact_9=RI, HelpURL=https://www.te.com/global-en/product-1-1740194-2.html, ID=x0002, Наименование=1-1740194-2, Описание="D-Sub 9 pin Board-to-Board", Производитель="TE Connectivity", Фамилия=Ларионов

## Free pads (board coordinates)
  round 4.5 hole 2.2: 1(53,60) 2(53,90)

## Via types
v1: diameter 0.6, hole 0.3, Top Layer to Bottom Layer, tented top, 239 vias

## Nets (pads, with @x,y where several pads share a name; then routed paths per layer and width w, separated by ;. In a path a pad name is that pad's centre, name@x,y a point inside that pad or via, vN(x,y) a via of type N, cw(c..) or ccw(c..) an arc to the next point about the centre after c; other vN are vias at no path point)
+5V: C3.2 C5.1 C7.2 DD1.7 DD1.8 DD2.16 HL2.2 HL3.2 L1.2 R1.2 R3.2 VD7.2 | length 23
  Top Layer w0.15: v1@67.475,68.025 v1(67.5,68) ; C5.1@73.775,78 C5.1@73.8,78.025
  Top Layer w0.2: DD1.7 64.25,76.15 63.7,75.6 63.7,74.6 64,74.9 64,75.4 64.75,76.15 DD1.8
  Top Layer w0.3: C3.2@63.7,74.6 64.5,74.6 65,74.1 v1(65,74) 65,73.5 65.325,73.175 R3.2@66.2,73.175 ; HL3.2@66.325,69.1 66.325,68.475 66.775,68.025 v1@67.475,68.025 ; v1(67.5,68) 69.6,68 70.125,68.525 HL2.2@70.125,69.1 ; R1.2@67.7,74.725 v1(67.7,76) ; DD2.16 72.05,78.45 72.5,78 C5.1@73.775,78 ; C5.1@73.8,78.025 v1(73.8,79.5) ; v1(76.3,74) C7.2@76.3,75.575
  other v1: 75,67.5 76,67.5 75,70.5 76,70.5 60.5,86 63.5,86 61,87.5 62,87.5 63,87.5
CN_5V_IN: VD1.2 X1.1 | length 7.1
  Top Layer w0.3: X1.1 56.7,77.6 57.5,78.4 VD1.2@57.5,83.475
CN_D_N: VD2.1 X1.2 | length 6.3
  Top Layer w0.155: X1.2 56.121,77 56.218,76.903 57.839,76.903 58.019,76.722 59.757,76.722 59.847,76.813 59.847,76.942 59.272,77.517 59.272,78.403 VD2.1@59.05,78.625
CN_D_P: VD2.3 X1.3 | length 6.9
  Top Layer w0.155: X1.3 56.121,76.5 56.218,76.597 57.712,76.597 57.892,76.417 59.883,76.417 60.153,76.687 60.153,76.942 60.728,77.517 60.728,78.403 VD2.3@60.95,78.625
CTS: DD1.18 DD2.9 | length 9.4
  Top Layer w0.15: DD1.18 68.25,80.25 68.5,80.5 v1(68.5,81) ; v1(70,85.5) 70.122,85.5 70.347,85.275 DD2.9
  Bottom Layer w0.15: v1(68.5,81) 69.2,81 70,81.8 v1(70,85.5)
CTS_RS232: DD2.8 R8.1 VD6.1 | length 23.5
  Top Layer w0.15: v1(75.5,85) 75.622,85 75.897,85.275 DD2.8 ; v1(84.5,74) 84,74 83.675,74.325 VD6.1 R8.1@88.225,75
  Bottom Layer w0.15: v1(75.5,85) 75.5,84 84.5,75 v1(84.5,74)
GND: C1.1 C2.1 C3.1 C4.1 C5.2 C6.1 DD1.0 DD1.2 DD2.15 HL1.1 VD2.2 VD3.2 VD4.2 VD5.2 VD6.2 X1.5 X1.TP1 X2.2 X3.5 X3.TP1 | length 3.4
  Top Layer w0.15: DD1.0@64.75,79.75 DD1.0
  Top Layer w0.2: DD1.2@63.575,79.75 DD1.0@64.75,79.75
  Top Layer w0.3: v1(60,77.5) VD2.2@60,78.625
  other v1: 56,60 58,60 60,60 62,60 64,60 66,60 68,60 70,60 72,60 74,60 76,60 78,60 80,60 82,60 84,60 86,60 88,60 90,60 92,60 55,62 57,62 59,62 61,62 63,62 65,62 67,62 69,62 71,62 73,62 75,62 77,62 79,62 81,62 83,62 85,62 87,62 89,62 91,62 93,62 52,64 54,64 56,64 58,64 60,64 62,64 64,64 66,64 68,64 70,64 72,64 74,64 76,64 78,64 80,64 82,64 90,64 92,64 53,66 55,66 57,66 59,66 61,66 63,66 65,66 67,66 69,66 71,66 73,66 75,66 77,66 79,66 81,66 89,66 91,66 93,66 95,66 97,66 101,66 54,68 56,68 58,68 60,68 62,68 64,68 72,68 80,68 84,68 86,68 88,68 90,68 92,68 94,68 96,68 100,68 57,70 59,70 71,70 93,70 101,70 58,72 60,72 62,72 72,72 74,72 76,72 78,72 80,72 92,72 100,72 55,74 57,74 59,74 73,74 75,74 79,74 83,74 87,74 89,74 91,74 101,74 72,76 82,76 86,76 88,76 90,76 100,76 71,78 79,78 93,78 97,78 99,78 101,78 65,78.5 66,78.5 65,79.5 66,79.5 86,80 88,80 90,80 92,80 100,80 55,82 63,82 65,82 87,82 89,82 91,82 93,82 95,82 97,82 101,82 54,84 56,84 60,84 64,84 66,84 74,84 86,84 88,84 90,84 92,84 94,84 96,84 100,84 53,86 55,86 65,86 67,86 69,86 71,86 73,86 75,86 77,86 79,86 87,86 89,86 91,86 93,86 56,88 66,88 68,88 70,88 72,88 74,88 76,88 78,88 80,88 82,88 84,88 86,88 88,88 90,88 92,88 57,90 59,90 61,90 63,90 65,90 67,90 69,90 71,90 73,90 75,90 77,90 79,90 81,90 83,90 85,90 87,90 89,90 91,90 93,90
NetC1_2: C1.2 C2.2 DD1.5 DD1.6 | length 10.5
  Top Layer w0.15: C1.2@60.5,74.6 62.1,74.6 62.5,75
  Top Layer w0.2: C2.2@62.1,74.6 62.1,77.6 62.75,78.25 DD1.5@63.575,78.25 ; 62.5,75 62.5,77.4 62.85,77.75 DD1.6@63.575,77.75
NetC4_2: C4.2 DD1.16 | length 2.5
  Top Layer w0.15: DD1.16 68.45,79.25 68.9,79.7 C4.2@69.7,79.7
NetC6_2: C6.2 DD2.6 | length 4.1
  Top Layer w0.15: DD2.6 78.975,83.975 80,85 80,85.3 80.2,85.5 C6.2@81.275,85.5
NetC7_1: C7.1 DD2.2 | length 4.8
  Top Layer w0.15: C7.1@76.2,78.025 76.2,80.9 76.675,81.375 DD2.2
NetC8_1: C8.1 DD2.1 | length 7.9
  Top Layer w0.15: DD2.1 78.925,80.725 79.5,80.15 79.5,79.9 80.3,79.1 83.5,79.1 83.738,79.338 83.738,80.487 C8.1@83.725,80.5
NetC8_2: C8.2 DD2.3 | length 4.1
  Top Layer w0.15: DD2.3 78.975,82.025 80,81 80,80.7 80.2,80.5 C8.2@81.275,80.5
NetC9_1: C9.1 DD2.4 | length 7.3
  Top Layer w0.15: DD2.4 78.925,82.675 79.9,81.7 83.4,81.7 83.725,82.025 C9.1@83.725,83
NetC9_2: C9.2 DD2.5 | length 3.5
  Top Layer w0.15: DD2.5 78.975,83.325 79.3,83 C9.2@81.275,83
NetHL1_2: HL1.2 R1.1 | length 8.1
  Top Layer w0.15: HL1.2@62.525,69.1 62.525,70.525 63.5,71.5 66.7,71.5 67.7,72.5 R1.1@67.7,73.175
NetHL2_1: HL2.1 R2.2 | length 5
  Top Layer w0.15: HL2.1@68.475,69.1 68.475,70.275 70.7,72.5 R2.2@70.7,73.175
NetHL3_1: HL3.1 R4.2 | length 7.1
  Top Layer w0.15: HL3.1@64.675,69.1 64.7,69.125 64.7,70 65.2,70.5 67.2,70.5 69.2,72.5 R4.2@69.2,73.175
NetL1_1: L1.1 VD1.1 VD2.5 | length 10.1
  Top Layer w0.3: VD1.1@57.5,86.525 58.575,86.525 59,86.1 59,83.2 60,82.2 ; VD2.5@60,81.375 60,82.2 ; L1.1 61.36,84.26 61,83.9 61,83.2 60,82.2
NetR5_2: R5.2 X3.2 | length 6.4
  Top Layer w0.15: R5.2@89.775,70 91.5,70 92.5,71 94.4,71 94.7,71.3 X3.2
NetR6_2: R6.2 X3.8 | length 8.8
  Top Layer w0.15: R6.2@89.775,77.5 91.5,77.5 92.63,76.37 X3.8
NetR7_2: R7.2 X3.3 | length 6.7
  Top Layer w0.15: R7.2@89.775,72.5 91.5,72.5 92.5,73.5 94.4,73.5 94.7,73.8 X3.3
NetR8_2: R8.2 X3.7 | length 10.2
  Top Layer w0.15: R8.2@89.775,75 91.5,75 92.5,76 96.5,76 98.1,74.4 X3.7
NetVD7_1: VD7.1 X2.1 | length 8.7
  Top Layer w0.3: VD7.1@78.525,69.1 80.5,69.1 82,67.6 82,66.1 82.95,65.15 X2.1
RST: DD1.9 R3.1 | length 2.7
  Top Layer w0.15: DD1.9 65.25,76.15 66.2,75.2 R3.1@66.2,74.725
RTS: DD1.19 DD2.10 | length 8.3
  Top Layer w0.15: DD1.19 66.75,81.75 66.975,81.975 67.475,81.975 v1(67.5,82) ; v1(69.5,84.5) 69.568,84.568 71.993,84.568 DD2.10
  Bottom Layer w0.15: v1(67.5,82) 68.6,82 69.5,82.9 v1(69.5,84.5)
RTS_RS232: DD2.7 R6.1 VD5.1 | length 19.3
  Top Layer w0.15: v1(76.5,84.5) 76.568,84.568 77.893,84.568 DD2.7 ; v1(84.5,76.5) 84,76.5 83.675,76.825 VD5.1 R6.1@88.225,77.5
  Bottom Layer w0.15: v1(76.5,84.5) 76.5,84 83.975,76.525 84.475,76.525 v1(84.5,76.5)
RX: DD1.20 DD2.12 | length 7.4
  Top Layer w0.15: DD1.20 66.25,81.95 67.625,83.325 DD2.12
RX_LED: DD1.13 R4.1 | length 4.1
  Top Layer w0.15: DD1.13 67.95,77.75 69.2,76.5 R4.1@69.2,74.725
RX_RS232: DD2.13 R7.1 VD4.1 | length 24.1
  Top Layer w0.15: DD2.13 74.203,82.675 74.378,82.5 v1(74.5,82.5) ; v1(84.5,71.5) 84,71.5 83.675,71.825 VD4.1 R7.1@88.225,72.5
  Bottom Layer w0.15: v1(74.5,82.5) 74.5,81 83.975,71.525 84.475,71.525 v1(84.5,71.5)
TX: DD1.21 DD2.11 | length 8.2
  Top Layer w0.15: DD1.21 65.75,81.95 67.775,83.975 DD2.11
TX_LED: DD1.14 R2.1 | length 5.2
  Top Layer w0.15: DD1.14 67.95,78.25 70.7,75.5 R2.1@70.7,74.725
TX_RS232: DD2.14 R5.1 VD3.1 | length 25.2
  Top Layer w0.15: DD2.14 72.062,82.013 73.488,82.013 v1(73.5,82) ; v1(84.5,69) 84,69 83.675,69.325 VD3.1 R5.1@88.225,70
  Bottom Layer w0.15: v1(73.5,82) 73.5,81.2 84.5,70.2 v1(84.5,69)
USB_D_N: DD1.4 VD2.6 | length 5.9
  Top Layer w0.155: VD2.6@59.05,81.375 59.05,81.175 59.553,80.672 59.757,80.672 59.847,80.582 59.847,80.327 60.332,79.843 61.452,79.843 62.447,78.847 63.177,78.847 63.274,78.75 DD1.4@63.575,78.75
USB_D_P: DD1.3 VD2.4 | length 5.4
  Top Layer w0.155: VD2.4@60.95,81.375 60.95,81.175 60.447,80.672 60.243,80.672 60.153,80.582 60.153,80.453 60.458,80.148 61.579,80.148 62.574,79.153 63.177,79.153 63.274,79.25 DD1.3@63.575,79.25
pads on no net: DD1.1 DD1.10 DD1.11 DD1.12 DD1.15 DD1.17 DD1.22 DD1.23 DD1.24 X1.4 X3. X3.1 X3.4 X3.6 X3.9

## Polygon pours and split planes (outlines as drawn)
GND on Top Layer "Top Layer-GND" (solid, pour order 45): 51.5,91.5 51.5,58.5 101.5,58.5 101.5,91.5
+5V on Top Layer "Top Layer-+5V 2" (solid, pour order 31): 76.5,71 73.5,71 73.5,67 76.5,67
+5V on Top Layer "Top Layer-+5V" (solid, pour order 43): 60,88.5 60,85 64,85 64,88.5
no net on Top Layer "Top Layer-No Net" (solid, pour order 33): 52,91.5
+5V on Top Layer "Top Layer-+5V 1" (solid, pour order 6): 58.8,88.8
+5V on Signal Layer 2 "Signal Layer 2-+5V" (solid, pour order 47): 101.5,91.5 101.5,58.5 51.5,58.5 51.5,91.5
no net on Signal Layer 2 "Signal Layer 2-No Net" (solid, pour order 27): 94,100.3
GND on Signal Layer 1 "Signal Layer 1-GND" (solid, pour order 19): 101.5,58.5 101.5,91.5 51.5,91.5 51.5,58.5
GND on Bottom Layer "Bottom Layer-GND" (solid, pour order 23): 101.5,58.5 101.5,91.5 51.5,91.5 51.5,58.5

## Silkscreen, mask and mechanical layers (free items; w line width, h text height)
Top Overlay:
  lines w0.2: 64.5,64 64.5,65 ; 64.5,64 66.5,64 ; 64.5,64 64.5,65 ; 64.5,64 64.5,64 ; 64.5,64 62.5,64 62.5,65 64.5,65 ; 64.5,65 66.5,65 ; 66.5,64 66.5,65 ; 66.5,64 68.5,64 ; 66.5,64 66.5,64 ; 66.5,64 66.5,65 ; 66.5,65 68.5,65 68.5,64 ; 68.5,64 68.5,64
  text "USB-RS232" at 61,90 h3
  text "PWR" at 60,66.3 h1.2
  text "RX" at 63.9,66.3 h1.2
  text "TX" at 67.8,66.3 h1.2
  text ".designation" at 57.5,57.5 h2
Bottom Overlay:
  lines w0.2: 89.251,83.6 89.251,85.6 89.651,86 89.651,88.2 90.651,88.2 91.551,87.3 91.551,85.6 91.551,83.6 ; 89.251,84.6 91.551,84.6 ; 92.551,83.6 92.551,85.6 92.551,87.3 93.451,88.2 94.451,88.2 94.451,85.6 94.851,85.6 94.851,83.6 ; 92.551,84.6 94.851,84.6
  lines w0.5: 90.749,89 95.251,89 95.251,87
  text ".pcb_dec_number" at 73.5,57.5 h2
Top Solder:
  rectangle: 77.1,80.4 78.8,85.6
  rectangle: 71.2,80.4 72.9,85.6
  rectangle: 64,80.3 67,81.4
  rectangle: 66.8,77.5 67.9,80.5
  rectangle: 64,76.6 67,77.7
  rectangle: 63.1,77.5 64.2,80.5
Board:
  the board outline again, w0.2
Assembly Notes (Mech5):
  text "'.title'" at 50.1,97.5 h2
  text "'.project'_'.pcb_dec_number'['.Pcb_File_Name_No_Path']" at 50.1,95 h2